# EAGLE board teensyShield1.7 (EAGLE 7.7.0)
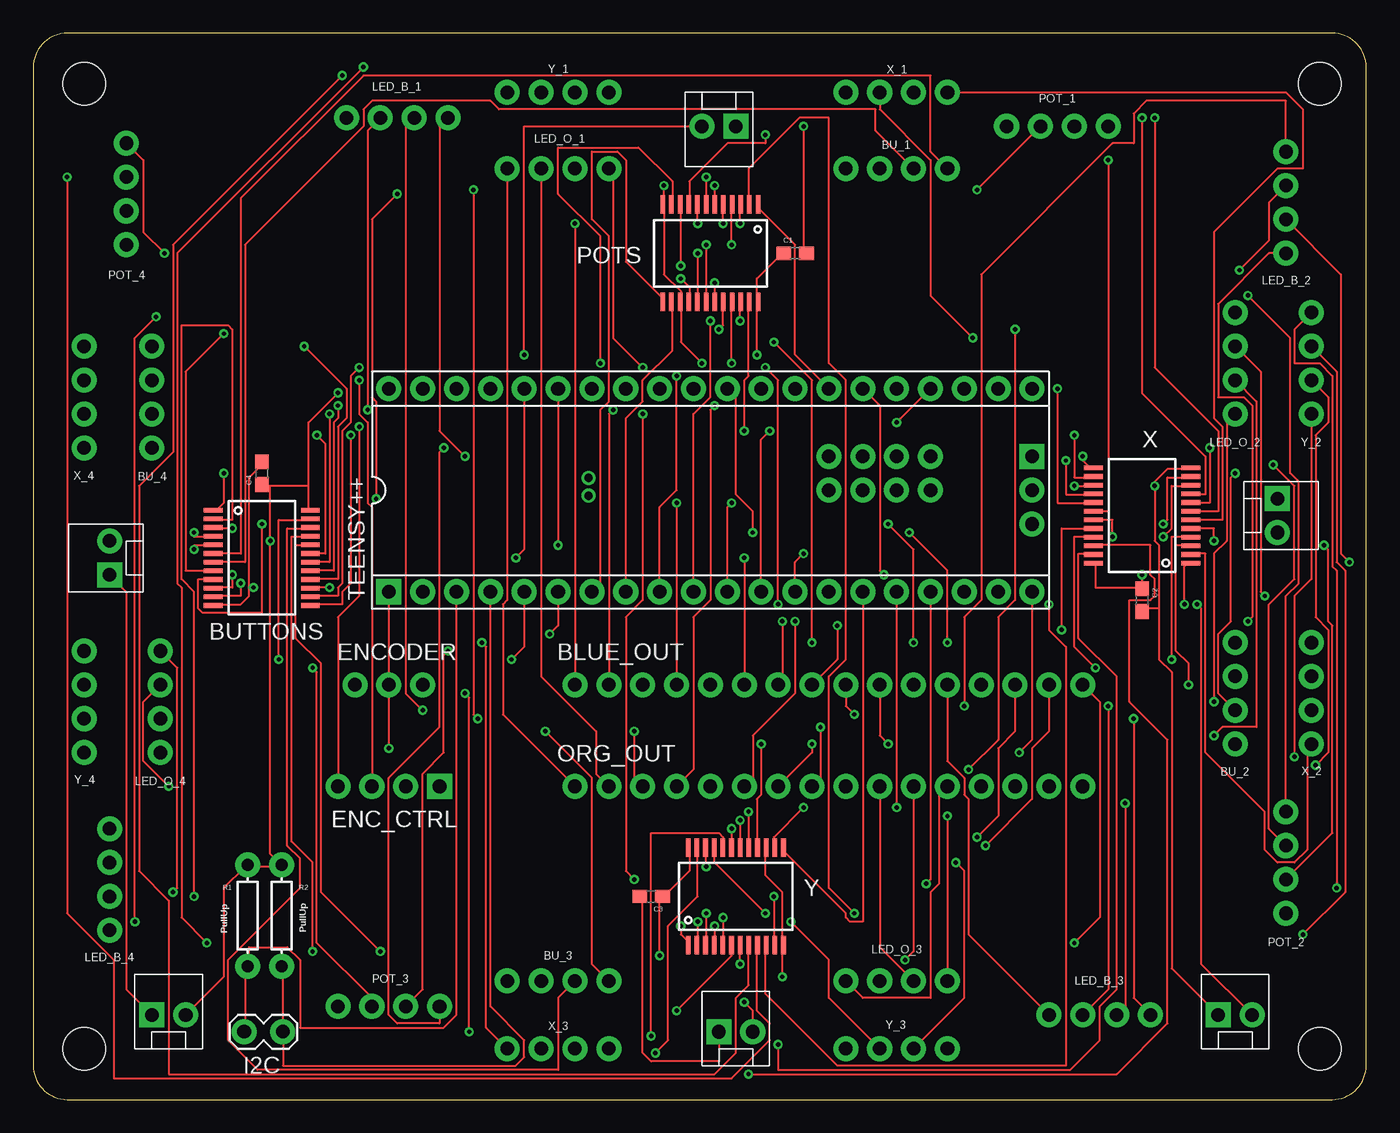
[diagram p0: board, top side]
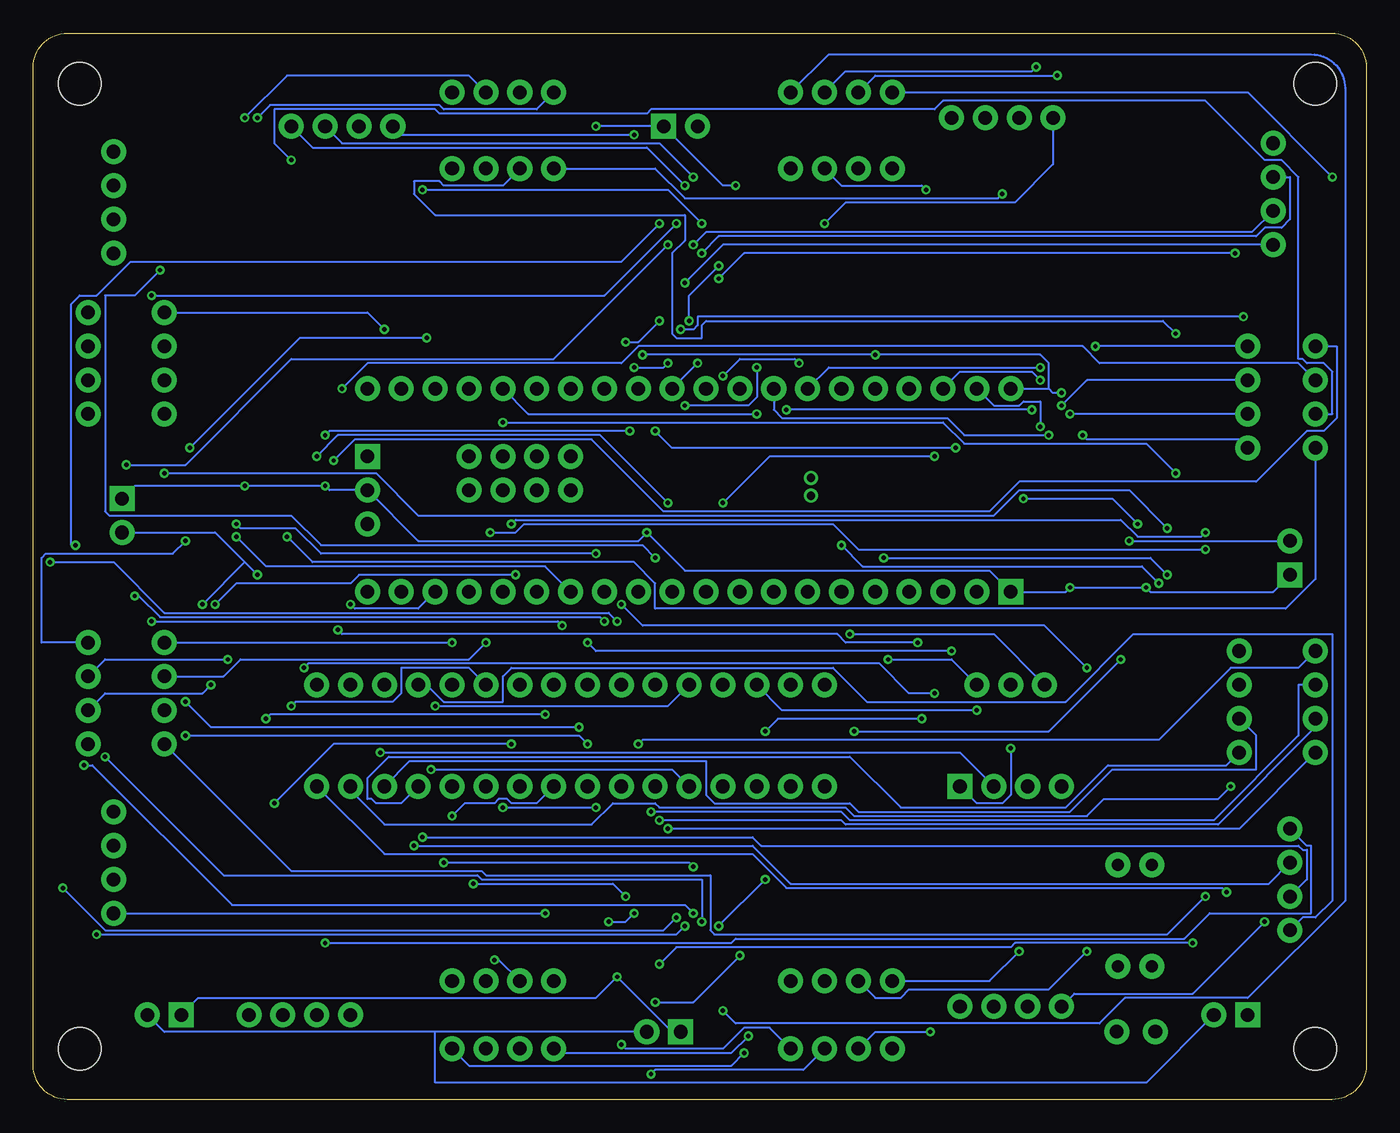
[diagram p1: board, bottom side, seen from below]

Size 100 x 80 mm. Coordinates in mm from the lower left corner, seen from the top.
Outline: 2.54,0 97.46,0 arc90 100,2.54 100,77.46 arc90 97.46,80 2.54,80 arc90 0,77.46 0,2.54 arc90 2.54,0
Copper layers (1*16): Top 0.0356mm / dielectric 1.5011mm / Bottom 0.0356mm
Design rules "oshpark-2layer": minimum track width 6mil, minimum drill 13mil, track to track 6mil, track to pad 6mil, pad to pad 6mil, via to via 6mil, smd to smd 6mil, copper to edge 15mil, drill to drill 6mil, minimum pad ring 7mil, minimum via ring 7mil, stop-mask expansion 2.5mil, vias tented up to drill 0mil, thermal gap 10mil
Holes 3.2 mm at 96.52,3.81 96.52,76.2 3.81,76.2 3.81,3.81

## Footprints (pad centres in the part's own frame; a part is rotated, then mirrored left to right if it is on the bottom)
1X16_NO_SILK = drill 1.016 pad 1.88: 1 0,0; 2 2.54,0; 3 5.08,0; 4 7.62,0; 5 10.16,0; 6 12.7,0; 7 15.24,0; 8 17.78,0; 9 20.32,0; 10 22.86,0; 11 25.4,0; 12 27.94,0; 13 30.48,0; 14 33.02,0; 15 35.56,0; 16 38.1,0
1X04_NO_SILK_ALL_ROUND = drill 1.016 pad 1.88: 1 0,0; 2 2.54,0; 3 5.08,0; 4 7.62,0
SSOP24 = smd 0.348 x 1.397: 1 -3.575,-3.656; 2 -2.925,-3.656; 3 -2.275,-3.656; 4 -1.625,-3.656; 5 -0.975,-3.656; 6 -0.325,-3.656; 7 0.325,-3.656; 8 0.975,-3.656; 9 1.625,-3.656; 10 2.275,-3.656; 11 2.925,-3.656; 12 3.575,-3.656; 13 3.575,3.656; 14 2.925,3.656; 15 2.275,3.656; 16 1.625,3.656; 17 0.975,3.656; 18 0.325,3.656; 19 -0.325,3.656; 20 -0.975,3.656; 21 -1.625,3.656; 22 -2.275,3.656; 23 -2.925,3.656; 24 -3.575,3.656
0603 = smd 1.1 x 1: 1 -0.85,0; 2 0.85,0
1X04_NO_SILK = drill 1.016 pad 1.88 square: 1 0,0 | drill 1.016 pad 1.88: 2 2.54,0; 3 5.08,0; 4 7.62,0
1X03_NO_SILK = drill 1.016 pad 1.88: 1 0,0; 2 2.54,0; 3 5.08,0
1X02_LOCK = drill 1.016 pad 1.88: 1 -0.178,0; 2 2.718,0
MOLEX-1X2 = drill 1.016 pad 1.88 square: 1 0,0 | drill 1.016 pad 1.88: 2 2.54,0
AXIAL-0.3 = drill 0.9 pad 1.88: P$1 -3.81,0; P$2 3.81,0
TEENSY++ = drill 1.016 pad 1.88: 5V 24.13,-2.54; +5V -24.13,7.62; A0 8.89,0; A1 11.43,0; A2 13.97,0; A3 16.51,0; A4 8.89,2.54; A5 11.43,2.54; A6 13.97,2.54; A7 16.51,2.54; B0 -6.35,7.62; B1 -8.89,7.62; B2 -11.43,7.62; B3 -13.97,7.62; B4 -16.51,7.62; B5 -19.05,7.62; B6 -21.59,7.62; B7 -21.59,-7.62; C0 6.35,-7.62; C1 8.89,-7.62; C2 11.43,-7.62; C3 13.97,-7.62; C4 16.51,-7.62; C5 19.05,-7.62; C6 21.59,-7.62; C7 24.13,-7.62; D0 -19.05,-7.62; D1 -16.51,-7.62; D2 -13.97,-7.62; D3 -11.43,-7.62; D4 -8.89,-7.62; D5 -6.35,-7.62; D6 -3.81,-7.62; D7 -1.27,-7.62; E0 1.27,-7.62; E1 3.81,-7.62; E6 -1.27,7.62; E7 -3.81,7.62; F0 6.35,7.62; F1 8.89,7.62; F2 11.43,7.62; F3 13.97,7.62; F4 16.51,7.62; F5 19.05,7.62; F6 21.59,7.62; F7 24.13,7.62; GND2 24.13,0; GRND1 1.27,7.62; REF 3.81,7.62 | drill 0.635 pad 1.067: E4 -9.144,0.914; E5 -9.144,-0.406 | drill 1.016 pad 1.88 square: GND -24.13,-7.62; RST 24.13,2.54

## Placement (x,y rotation side)
BLUE_OUT  [1X16_NO_SILK]  40.64,31.11 0 top
BU_1  [1X04_NO_SILK_ALL_ROUND]  60.96,69.85 0 top
BU_2  [1X04_NO_SILK_ALL_ROUND]  90.17,34.29 270 top
BU_3  [1X04_NO_SILK_ALL_ROUND]  43.18,8.89 180 top
BU_4  [1X04_NO_SILK_ALL_ROUND]  8.89,48.9 90 top
BUTTONS  MUX-74HC4067  [SSOP24]  17.14,40.64 270 top
C1  0.1uF  [0603]  57.15,63.5 0 top
C2  0.1uF  [0603]  83.19,37.47 270 top
C3  0.1uF  [0603]  46.35,15.24 180 top
C4  0.1uF  [0603]  17.14,46.99 90 top
ENC_CTRL  [1X04_NO_SILK]  30.48,23.5 180 top
ENCODER  [1X03_NO_SILK]  24.13,31.11 0 top
I2C  [1X02_LOCK]  18.54,5.09 180 top
LED_B_1  [1X04_NO_SILK_ALL_ROUND]  23.5,73.66 0 top
LED_B_2  [1X04_NO_SILK_ALL_ROUND]  93.98,71.12 270 top
LED_B_3  [1X04_NO_SILK_ALL_ROUND]  83.82,6.35 180 top
LED_B_4  [1X04_NO_SILK_ALL_ROUND]  5.71,12.7 90 top
LED_O_1  [1X04_NO_SILK_ALL_ROUND]  35.56,69.85 0 top
LED_O_2  [1X04_NO_SILK_ALL_ROUND]  90.17,59.05 270 top
LED_O_3  [1X04_NO_SILK_ALL_ROUND]  68.58,8.89 180 top
LED_O_4  [1X04_NO_SILK_ALL_ROUND]  9.53,26.04 90 top
ORG_OUT  [1X16_NO_SILK]  40.64,23.5 0 top
POT_1  [1X04_NO_SILK_ALL_ROUND]  73.03,73.03 0 top
POT_2  [1X04_NO_SILK_ALL_ROUND]  93.98,21.59 270 top
POT_3  [1X04_NO_SILK_ALL_ROUND]  30.48,6.99 180 top
POT_4  [1X04_NO_SILK_ALL_ROUND]  6.99,64.14 90 top
POTS  MUX-74HC4067  [SSOP24]  50.8,63.5 180 top
POW_1  [MOLEX-1X2]  5.71,39.37 90 top
POW_2  [MOLEX-1X2]  52.7,73.03 180 top
POW_3  [MOLEX-1X2]  93.34,45.09 270 top
POW_4  [MOLEX-1X2]  51.44,5.08 0 top
POW_IN  [MOLEX-1X2]  8.89,6.35 0 top
POW_OUT  [MOLEX-1X2]  88.9,6.35 0 top
R1  PullUp  [AXIAL-0.3]  16.09,13.8 90 top
R2  PullUp  [AXIAL-0.3]  18.63,13.8 270 top
TEENSY++  ARDUINO-TEENSY++  [TEENSY++]  50.8,45.72 0 top
X  MUX-74HC4067  [SSOP24]  83.19,43.81 90 top
X_1  [1X04_NO_SILK_ALL_ROUND]  60.96,75.56 0 top
X_2  [1X04_NO_SILK_ALL_ROUND]  95.89,34.29 270 top
X_3  [1X04_NO_SILK_ALL_ROUND]  43.18,3.81 180 top
X_4  [1X04_NO_SILK_ALL_ROUND]  3.81,48.9 90 top
Y  MUX-74HC4067  [SSOP24]  52.7,15.24 0 top
Y_1  [1X04_NO_SILK_ALL_ROUND]  35.56,75.56 0 top
Y_2  [1X04_NO_SILK_ALL_ROUND]  95.89,59.05 270 top
Y_3  [1X04_NO_SILK_ALL_ROUND]  68.58,3.81 180 top
Y_4  [1X04_NO_SILK_ALL_ROUND]  3.81,26.04 90 top

## Library data of the parts
BLUE_OUT ENCODER I2C ORG_OUT POW_1-POW_4 POW_IN POW_OUT = SparkFun-Connectors
BU_1-BU_4 ENC_CTRL LED_B_1-LED_B_4 LED_O_1-LED_O_4 POT_1-POT_4 X_1-X_4 Y_1-Y_4 = SparkFun-Connectors; PROD_ID: CONN-09696
BUTTONS C1-C4 POTS X Y = SparkFun
R1 R2 = SparkFun-Resistors; PROD_ID: RES-9435
TEENSY++ = teensypp

## Nets
5V: BUTTONS.24 C1.1 C2.1 C3.1 C4.1 POTS.24 POW_1.2 POW_2.2 POW_3.2 POW_4.2 POW_IN.2 POW_OUT.2 R1.P$2 R2.P$1 TEENSY++.+5V X.24 Y.24
BU_C0: BU_1.1 BUTTONS.9
BU_C1: BU_1.2 BUTTONS.8
BU_C2: BU_1.3 BUTTONS.7
BU_C3: BU_1.4 BUTTONS.6
BU_C4: BU_2.1 BUTTONS.5
BU_C5: BU_2.2 BUTTONS.4
BU_C6: BU_2.3 BUTTONS.3
BU_C7: BU_2.4 BUTTONS.2
BU_C8: BU_3.1 BUTTONS.23
BU_C9: BU_3.2 BUTTONS.22
BU_C10: BU_3.3 BUTTONS.21
BU_C11: BU_3.4 BUTTONS.20
BU_C12: BU_4.1 BUTTONS.19
BU_C13: BU_4.2 BUTTONS.18
BU_C14: BU_4.3 BUTTONS.17
BU_C15: BU_4.4 BUTTONS.16
ENC_1: ENCODER.3 TEENSY++.D2
ENC_2: ENCODER.1 TEENSY++.D3
ENC_BU: ENC_CTRL.2 TEENSY++.C7
ENC_G: ENC_CTRL.3 TEENSY++.B5
ENC_R: ENC_CTRL.4 TEENSY++.B6
GND: BUTTONS.12 BUTTONS.15 C1.2 C2.2 C3.2 C4.2 ENC_CTRL.1 ENCODER.2 POTS.12 POTS.15 POW_1.1 POW_2.1 POW_3.1 POW_4.1 POW_IN.1 POW_OUT.1 TEENSY++.GND TEENSY++.GND2 TEENSY++.GRND1 X.12 X.15 Y.12 Y.15
LED_B_C0: BLUE_OUT.1 LED_B_1.1
LED_B_C1: BLUE_OUT.2 LED_B_1.2
LED_B_C2: BLUE_OUT.3 LED_B_1.3
LED_B_C3: BLUE_OUT.4 LED_B_1.4
LED_B_C4: BLUE_OUT.5 LED_B_2.1
LED_B_C5: BLUE_OUT.6 LED_B_2.2
LED_B_C6: BLUE_OUT.7 LED_B_2.3
LED_B_C7: BLUE_OUT.8 LED_B_2.4
LED_B_C8: BLUE_OUT.9 LED_B_3.1
LED_B_C9: BLUE_OUT.10 LED_B_3.2
LED_B_C10: BLUE_OUT.11 LED_B_3.3
LED_B_C11: BLUE_OUT.12 LED_B_3.4
LED_B_C12: BLUE_OUT.13 LED_B_4.1
LED_B_C13: BLUE_OUT.14 LED_B_4.2
LED_B_C14: BLUE_OUT.15 LED_B_4.3
LED_B_C15: BLUE_OUT.16 LED_B_4.4
LED_O_C0: LED_O_1.1 ORG_OUT.1
LED_O_C1: LED_O_1.2 ORG_OUT.2
LED_O_C2: LED_O_1.3 ORG_OUT.3
LED_O_C3: LED_O_1.4 ORG_OUT.4
LED_O_C4: LED_O_2.1 ORG_OUT.5
LED_O_C5: LED_O_2.2 ORG_OUT.6
LED_O_C6: LED_O_2.3 ORG_OUT.7
LED_O_C7: LED_O_2.4 ORG_OUT.8
LED_O_C8: LED_O_3.1 ORG_OUT.9
LED_O_C9: LED_O_3.2 ORG_OUT.10
LED_O_C10: LED_O_3.3 ORG_OUT.11
LED_O_C11: LED_O_3.4 ORG_OUT.12
LED_O_C12: LED_O_4.1 ORG_OUT.13
LED_O_C13: LED_O_4.2 ORG_OUT.14
LED_O_C14: LED_O_4.3 ORG_OUT.15
LED_O_C15: LED_O_4.4 ORG_OUT.16
MUX1_S0: POTS.10 TEENSY++.D7
MUX1_S1: POTS.11 TEENSY++.D6
MUX1_S2: POTS.14 TEENSY++.D5
MUX1_S3: POTS.13 TEENSY++.D4
MUX1_SIG: POTS.1 TEENSY++.F1
MUX2_S0: TEENSY++.C1 X.10
MUX2_S1: TEENSY++.C0 X.11
MUX2_S2: TEENSY++.E1 X.14
MUX2_S3: TEENSY++.E0 X.13
MUX2_SIG: TEENSY++.F2 X.1
MUX3_S0: TEENSY++.C5 Y.10
MUX3_S1: TEENSY++.C4 Y.11
MUX3_S2: TEENSY++.C3 Y.14
MUX3_S3: TEENSY++.C2 Y.13
MUX3_SIG: TEENSY++.F3 Y.1
MUX4_S0: BUTTONS.10 TEENSY++.B3
MUX4_S1: BUTTONS.11 TEENSY++.B2
MUX4_S2: BUTTONS.14 TEENSY++.B1
MUX4_S3: BUTTONS.13 TEENSY++.B0
MUX4_SIG: BUTTONS.1 TEENSY++.F4
POT_C0: POT_1.1 POTS.9
POT_C1: POT_1.2 POTS.8
POT_C2: POT_1.3 POTS.7
POT_C3: POT_1.4 POTS.6
POT_C4: POT_2.1 POTS.5
POT_C5: POT_2.2 POTS.4
POT_C6: POT_2.3 POTS.3
POT_C7: POT_2.4 POTS.2
POT_C8: POT_3.1 POTS.23
POT_C9: POT_3.2 POTS.22
POT_C10: POT_3.3 POTS.21
POT_C11: POT_3.4 POTS.20
POT_C12: POT_4.1 POTS.19
POT_C13: POT_4.2 POTS.18
POT_C14: POT_4.3 POTS.17
POT_C15: POT_4.4 POTS.16
SCL: I2C.2 R1.P$1 TEENSY++.D0
SDA: I2C.1 R2.P$2 TEENSY++.D1
VCC: TEENSY++.5V
X_C0: X.9 X_1.1
X_C1: X.8 X_1.2
X_C2: X.7 X_1.3
X_C3: X.6 X_1.4
X_C4: X.5 X_2.1
X_C5: X.4 X_2.2
X_C6: X.3 X_2.3
X_C7: X.2 X_2.4
X_C8: X.23 X_3.1
X_C9: X.22 X_3.2
X_C10: X.21 X_3.3
X_C11: X.20 X_3.4
X_C12: X.19 X_4.1
X_C13: X.18 X_4.2
X_C14: X.17 X_4.3
X_C15: X.16 X_4.4
Y_C0: Y.9 Y_1.1
Y_C1: Y.8 Y_1.2
Y_C2: Y.7 Y_1.3
Y_C3: Y.6 Y_1.4
Y_C4: Y.5 Y_2.1
Y_C5: Y.4 Y_2.2
Y_C6: Y.3 Y_2.3
Y_C7: Y.2 Y_2.4
Y_C8: Y.23 Y_3.1
Y_C9: Y.22 Y_3.2
Y_C10: Y.21 Y_3.3
Y_C11: Y.20 Y_3.4
Y_C12: Y.19 Y_4.1
Y_C13: Y.18 Y_4.2
Y_C14: Y.17 Y_4.3
Y_C15: Y.16 Y_4.4

## Tracks (layer width: path | path; a pad name or v marks a point on that pad's centre or on a via)
5V  (via drill 0.33)
  Top 0.152: 83.19,38.42 79.69,38.42 79.69,40.32 X.24 | v83.19,39.37 83.19,38.42 | 83.19,38.42 C2.1 | Y.24 49.21,18.73 49.21,17.14 47.31,15.24 C3.1 46.99,15.24 v46.99,10.79 | v53.34,7.3 53.98,6.67 POW_4.2 | v87.31,37.15 87.63,36.83 87.63,10.16 POW_OUT.2 | C1.1 56.2,63.5 54.29,61.59 54.29,60.01 POTS.24 54.29,59.69 v54.29,55.88 | POW_2.2 36.83,73.03 v36.83,55.88 | POW_IN.2 14.29,9.21 14.29,15.88 15.88,17.46 R1.P$2 16.19,17.46 18.41,17.46 R2.P$1 18.41,17.78 17.78,18.41 v17.78,41.91 17.78,46.04 | 20.64,46.04 17.78,46.04 | 17.78,46.04 17.14,46.04 C4.1 | 20.64,46.04 20.64,44.13 BUTTONS.24 | v22.86,53.02 20.64,50.8 20.64,46.04
  Bottom 0.152: 84.14,40.32 86.36,42.55 POW_3.2 | 84.14,40.32 v83.19,39.37 | v46.99,10.79 50.48,7.3 v53.34,7.3 | POW_OUT.2 90.17,5.08 69.85,5.08 | POW_4.2 69.85,5.08 | v87.31,37.15 84.14,40.32 | v54.29,55.88 v36.83,55.88 24.45,55.88 23.81,55.24 23.81,53.34 | TEENSY++.+5V 23.81,53.34 | v17.78,41.91 POW_1.2 | 23.81,53.34 23.5,53.02 v22.86,53.02 | 69.85,5.08 69.85,1.27 16.51,1.27 POW_IN.2
BU_C0  (via drill 0.33)
  Top 0.152: v17.14,43.18 17.14,36.51 12.7,36.51 12.38,36.83 12.38,39.05 13.34,39.05 BUTTONS.9 | v25.72,45.09 25.72,52.39 25.4,52.7 25.4,66.04 v27.3,67.94
  Bottom 0.152: v17.14,43.18 19.05,45.09 v25.72,45.09 | v27.3,67.94 27.62,67.63 51.12,67.63 53.34,69.85 BU_1.1
BU_C1  (via drill 0.33)
  Top 0.152: v14.29,57.47 11.43,54.61 11.43,39.69 13.34,39.69 BUTTONS.8
  Bottom 0.152: v14.29,57.47 15.24,58.42 49.53,58.42 49.85,58.1 49.85,57.15 51.75,57.15 52.07,57.47 52.07,63.5 51.12,64.45 51.12,66.36 69.85,66.36 71.44,67.94 71.44,68.9 69.53,68.9 69.22,68.58 64.77,68.58 BU_1.2
BU_C2
  Top 0.152: BU_1.3 63.18,72.71 63.18,74.3 34.92,74.3 34.29,74.93 25.4,74.93 24.77,74.3 24.77,73.03 15.88,64.14 15.88,40.32 13.65,40.32 BUTTONS.7
BU_C3
  Top 0.152: BU_1.4 67.31,71.12 67.31,76.83 24.77,76.83 15.56,67.63 15.56,40.96 13.65,40.96 BUTTONS.6
BU_C4  (via drill 0.33)
  Top 0.152: v12.06,41.27 12.06,41.59 13.34,41.59 BUTTONS.5 | v65.72,42.55 68.58,39.69 v68.58,34.29
  Bottom 0.152: v12.06,41.27 38.1,41.27 40.01,43.18 63.18,43.18 63.82,42.55 v65.72,42.55 | BU_2.1 v68.58,34.29
BU_C5  (via drill 0.33)
  Top 0.152: v12.06,42.55 12.06,42.23 13.34,42.23 BUTTONS.4 | v64.14,43.18 66.04,41.27 v66.04,34.29
  Bottom 0.152: v12.06,42.55 12.38,42.23 17.14,42.23 18.41,43.5 63.82,43.5 v64.14,43.18 | v66.04,34.29 67.31,33.02 84.45,33.02 85.72,31.75 BU_2.2
BU_C6  (via drill 0.33)
  Top 0.152: v14.92,42.86 13.65,42.86 BUTTONS.3 | v90.17,46.99 89.85,46.67 89.85,35.88 88.9,34.92 88.9,30.48 BU_2.3
  Bottom 0.152: v14.92,42.86 17.78,45.72 26.04,45.72 27.94,43.81 71.12,43.81 74.3,46.99 v90.17,46.99
BU_C7  (via drill 0.33)
  Top 0.152: v12.06,15.24 12.06,38.1 11.11,39.05 11.11,58.1 14.61,58.1 14.92,57.78 14.92,43.5 13.65,43.5 BUTTONS.2
  Bottom 0.152: v12.06,15.24 14.92,12.38 48.9,12.38 49.21,12.7 49.21,16.83 66.04,16.83 66.36,17.14 80.64,17.14 BU_2.4
BU_C8  (via drill 0.33)
  Top 0.152: v18.41,33.02 18.41,43.5 20.64,43.5 BUTTONS.23 | v38.42,27.62 41.91,24.13 41.91,10.16 BU_3.1
  Bottom 0.152: v18.41,33.02 23.81,27.62 v38.42,27.62
BU_C9
  Top 0.152: BU_3.2 39.37,7.62 39.37,2.22 16.83,2.22 14.61,4.45 14.61,10.48 20,15.88 20,18.1 19.05,19.05 19.05,42.86 20.64,42.86 BUTTONS.22
BU_C10  (via drill 0.33)
  Top 0.152: v20.95,11.11 20.95,17.78 19.37,19.37 19.37,42.23 20.64,42.23 BUTTONS.21
  Bottom 0.152: v20.95,11.11 23.81,8.26 34.29,8.26 34.92,7.62 36.83,7.62 BU_3.3
BU_C11  (via drill 0.33)
  Top 0.152: v26.04,11.11 21.59,15.56 21.59,32.7 19.68,34.61 19.68,41.59 20.64,41.59 BUTTONS.20
  Bottom 0.152: v26.04,11.11 28.26,8.89 BU_3.4
BU_C12  (via drill 0.33)
  Top 0.152: v21.27,49.85 21.91,49.21 21.91,40.96 20.95,40.96 BUTTONS.19
  Bottom 0.152: v21.27,49.85 20.95,49.53 9.53,49.53 BU_4.1
BU_C13  (via drill 0.33)
  Top 0.152: v22.23,51.44 22.23,40.32 20.95,40.32 BUTTONS.18
  Bottom 0.152: BU_4.2 v22.23,51.44
BU_C14  (via drill 0.33)
  Top 0.152: v22.86,52.07 22.86,51.12 22.54,50.8 22.54,39.69 20.95,39.69 BUTTONS.17
  Bottom 0.152: v22.86,52.07 20.95,53.98 BU_4.3
BU_C15  (via drill 0.33)
  Top 0.152: v20.32,56.52 23.5,53.34 23.5,51.12 22.86,50.48 22.86,39.05 20.95,39.05 BUTTONS.16
  Bottom 0.152: BU_4.4 v20.32,56.52
ENC_1  (via drill 0.33)
  Top 0.152: v35.88,33.02 36.83,33.97 TEENSY++.D2
  Bottom 0.152: ENCODER.3 31.11,33.02 v35.88,33.02
ENC_2  (via drill 0.33)
  Top 0.152: v38.73,34.92 39.37,35.56 TEENSY++.D3
  Bottom 0.152: ENCODER.1 27.94,34.92 v38.73,34.92
ENC_BU  (via drill 0.33)
  Top 0.152: v73.98,26.04 74.93,26.99 TEENSY++.C7
  Bottom 0.152: ENC_CTRL.2 30.48,26.04 v73.98,26.04
ENC_G  (via drill 0.33)
  Top 0.152: ENC_CTRL.3 25.4,44.45 25.08,44.77 25.08,50.8 24.45,51.44 v24.45,53.98
  Bottom 0.152: v24.45,53.98 25.08,54.61 30.48,54.61 TEENSY++.B5
ENC_R  (via drill 0.33)
  Top 0.152: ENC_CTRL.4 22.86,36.2 24.45,37.78 v24.45,50.48
  Bottom 0.152: v24.45,50.48 24.45,52.39 25.72,52.39 26.04,52.07 27.94,52.07 TEENSY++.B6
GND  (via drill 0.33)
  Top 0.152: POW_IN.1 6.99,8.26 6.99,38.1 POW_1.1 | 16.19,38.42 16.19,37.78 15.56,37.15 13.65,37.15 BUTTONS.12 | 16.19,38.42 16.19,46.67 17.14,47.62 C4.2 | v22.23,38.42 20.95,38.42 BUTTONS.15 | TEENSY++.GND ENCODER.2 v26.67,26.35 | v16.51,38.42 16.19,38.42 | v57.78,73.03 57.78,63.5 C1.2 | v50.16,55.24 48.58,56.83 48.58,59.69 POTS.15 48.58,60.01 48.58,60.64 47.31,61.91 47.31,66.99 POTS.12 47.31,67.31 v47.31,68.58 | Y.15 54.93,18.73 54.93,16.83 56.2,15.56 56.2,11.75 Y.12 56.2,11.43 v56.2,9.21 | POW_4.1 51.44,2.86 46.35,2.86 45.72,3.49 45.72,15.24 C3.2 | v78.11,46.04 79.38,46.04 X.15 | 84.45,36.83 83.19,36.83 C2.2 | 84.45,36.83 84.45,41.59 84.14,41.91 v84.14,46.04 84.14,46.35 85.09,47.31 86.68,47.31 X.12 | POW_OUT.1 85.41,9.84 85.41,32.07 84.45,33.02 84.45,36.83 | TEENSY++.GRND1 52.7,52.7 52.7,45.4 53.98,44.13 v53.98,42.55
  Bottom 0.152: ENC_CTRL.1 29.21,22.23 27.3,22.23 26.67,22.86 v26.67,26.35 | POW_1.1 6.99,38.1 16.19,38.1 v16.51,38.42 v22.23,38.42 22.54,38.1 TEENSY++.GND 28.26,39.69 51.12,39.69 v53.98,42.55 54.61,41.91 71.12,41.91 TEENSY++.GND2 77.79,45.72 v78.11,46.04 v84.14,46.04 92.39,46.04 POW_3.1 | v57.78,73.03 POW_2.1 48.26,68.58 v47.31,68.58 | v50.16,55.24 TEENSY++.GRND1 | POW_4.1 52.07,5.08 v56.2,9.21 57.78,7.62 87.63,7.62 POW_OUT.1
LED_B_C0  (via drill 0.33)
  Top 0.152: v40.64,65.72 BLUE_OUT.1
  Bottom 0.152: v40.64,65.72 39.05,67.31 26.35,67.31 23.5,70.17 LED_B_1.1
LED_B_C1  (via drill 0.33)
  Top 0.152: BLUE_OUT.2 43.18,51.44 v43.5,51.75 | v25.08,51.75 25.08,72.71 LED_B_1.2
  Bottom 0.152: v25.08,51.75 v43.5,51.75
LED_B_C2  (via drill 0.33)
  Top 0.152: v29.21,29.21 27.94,30.48 27.94,73.03 LED_B_1.3
  Bottom 0.152: BLUE_OUT.3 43.81,29.21 v29.21,29.21
LED_B_C3  (via drill 0.33)
  Top 0.152: v48.26,44.77 BLUE_OUT.4 | v32.38,48.26 30.48,50.16 30.48,73.03 LED_B_1.4
  Bottom 0.152: v48.26,44.77 44.77,48.26 v32.38,48.26
LED_B_C4  (via drill 0.33)
  Top 0.152: v69.85,29.53 69.85,36.2 71.12,37.47 71.12,61.91 80.96,71.75 82.55,71.75 82.55,73.98 83.5,74.93 93.98,74.93 LED_B_2.1
  Bottom 0.152: BLUE_OUT.5 52.39,29.53 v69.85,29.53
LED_B_C5  (via drill 0.33)
  Top 0.152: v53.34,40.64 BLUE_OUT.6 | v90.49,62.23 92.71,64.45 92.71,67.31 LED_B_2.2
  Bottom 0.152: v53.34,40.64 54.29,41.59 78.42,41.59 80.64,43.81 94.3,43.81 94.61,44.13 94.61,60.33 92.39,60.33 v90.49,62.23
LED_B_C6  (via drill 0.33)
  Top 0.152: BLUE_OUT.7 56.2,31.43 v56.2,35.88 | v98.74,40.32 98.11,40.96 98.11,61.91 LED_B_2.3
  Bottom 0.152: v56.2,35.88 56.83,36.51 90.17,36.51 93.98,40.32 v98.74,40.32
LED_B_C7  (via drill 0.33)
  Top 0.152: BLUE_OUT.8 60.33,33.02 v60.33,35.56 | v91.12,35.88 91.44,36.2 91.44,52.07 90.81,52.7 88.9,52.7 88.9,59.69 92.71,63.5 LED_B_2.4
  Bottom 0.152: v60.33,35.56 60.64,35.88 v91.12,35.88
LED_B_C8  (via drill 0.33)
  Top 0.152: LED_B_3.1 82.55,7.62 v82.55,28.57 | v61.59,28.89 60.96,29.53 BLUE_OUT.9
  Bottom 0.152: v82.55,28.57 82.23,28.89 v61.59,28.89
LED_B_C9  (via drill 0.33)
  Top 0.152: LED_B_3.2 81.92,6.99 v81.92,22.23 | v64.14,26.67 63.5,27.3 BLUE_OUT.10
  Bottom 0.152: v81.92,22.23 77.47,26.67 v64.14,26.67
LED_B_C10  (via drill 0.33)
  Top 0.152: LED_B_3.3 80.64,8.26 v80.64,29.53
  Bottom 0.152: v80.64,29.53 80.33,29.84 73.03,29.84 72.39,30.48 72.39,32.38 67.31,32.38 BLUE_OUT.11
LED_B_C11
  Top 0.152: LED_B_3.4 70.17,12.38 70.17,22.54 69.85,22.86 69.85,24.13 68.58,25.4 BLUE_OUT.12
LED_B_C12
  Bottom 0.152: LED_B_4.1 4.76,13.65 3.81,13.65 2.54,14.92 2.54,34.92 17.46,34.92 22.54,29.84 37.47,29.84 40.01,32.38 64.14,32.38 64.77,31.75 64.77,29.84 69.22,29.84 70.48,31.11 BLUE_OUT.13
LED_B_C13  (via drill 0.33)
  Top 0.152: v70.8,19.68 72.39,21.27 72.39,26.35 73.66,27.62 BLUE_OUT.14
  Bottom 0.152: LED_B_4.2 4.45,16.51 4.45,18.73 4.76,18.73 5.08,19.05 45.4,19.05 46.04,19.68 v70.8,19.68
LED_B_C14  (via drill 0.33)
  Top 0.152: v71.44,19.05 74.93,22.54 74.93,26.35 76.2,27.62 BLUE_OUT.15
  Bottom 0.152: LED_B_4.3 7.3,16.19 43.18,16.19 46.04,19.05 v71.44,19.05
LED_B_C15  (via drill 0.33)
  Top 0.152: v78.11,11.75 80.01,13.65 80.01,29.84 BLUE_OUT.16
  Bottom 0.152: LED_B_4.4 4.45,19.05 4.13,19.05 4.13,13.97 11.75,13.97 13.65,12.06 47.31,12.06 47.62,11.75 v78.11,11.75
LED_O_C0
  Top 0.152: ORG_OUT.1 35.24,28.89 35.24,37.15 35.56,37.47 LED_O_1.1
LED_O_C1
  Top 0.152: ORG_OUT.2 42.23,24.45 42.23,27.62 38.1,31.75 LED_O_1.2
LED_O_C2  (via drill 0.33)
  Top 0.152: ORG_OUT.3 45.09,24.13 v45.09,27.62 | v33.34,28.57 33.02,28.89 v33.02,68.26
  Bottom 0.152: v45.09,27.62 44.13,28.57 v33.34,28.57 | v33.02,68.26 33.34,68.58 39.37,68.58 LED_O_1.3
LED_O_C3  (via drill 0.33)
  Top 0.152: ORG_OUT.4 49.53,24.77 49.53,36.2 50.8,37.47 50.8,51.75 v51.12,52.07 | v45.72,54.93 43.5,57.15 43.5,69.53 LED_O_1.4
  Bottom 0.152: v51.12,52.07 46.35,52.07 45.72,52.7 v45.72,54.93
LED_O_C4  (via drill 0.33)
  Top 0.152: v70.17,24.77 72.39,26.99 72.39,36.2 73.66,37.47 v73.66,57.78
  Bottom 0.152: ORG_OUT.5 52.07,24.77 v70.17,24.77 | v73.66,57.78 74.93,59.05 LED_O_2.1
LED_O_C5  (via drill 0.33)
  Top 0.152: ORG_OUT.6 53.98,24.13 53.98,27.3 57.15,30.48 v57.15,35.88 | v92.39,37.78 92.08,38.1 92.08,54.61 LED_O_2.2
  Bottom 0.152: v57.15,35.88 57.47,36.2 90.49,36.2 92.08,37.78 v92.39,37.78
LED_O_C6  (via drill 0.33)
  Top 0.152: ORG_OUT.7 58.42,26.04 v58.42,26.67 | v88.58,27.3 89.22,27.94 91.76,27.94 91.76,52.39 LED_O_2.3
  Bottom 0.152: v58.42,26.67 59.05,27.3 v88.58,27.3
LED_O_C7  (via drill 0.33)
  Top 0.152: ORG_OUT.8 59.05,24.13 v59.05,27.94 | v88.58,29.84 88.58,40.96 89.53,41.91 89.53,50.8 LED_O_2.4
  Bottom 0.152: v59.05,27.94 86.68,27.94 v88.58,29.84
LED_O_C8  (via drill 0.33)
  Top 0.152: v68.58,21.27 LED_O_3.1
  Bottom 0.152: v68.58,21.27 67.63,22.23 65.41,22.23 65.09,22.54 64.45,22.54 64.14,22.23 62.23,22.23 ORG_OUT.9
LED_O_C9
  Top 0.152: LED_O_3.2 63.5,11.43 ORG_OUT.10
LED_O_C10  (via drill 0.33)
  Top 0.152: v65.41,10.48 66.04,11.11 ORG_OUT.11
  Bottom 0.152: LED_O_3.3 65.09,10.48 v65.41,10.48
LED_O_C11
  Top 0.152: LED_O_3.4 62.23,7.62 67.31,7.62 67.31,15.56 67.94,16.19 67.94,22.86 ORG_OUT.12
LED_O_C12
  Bottom 0.152: LED_O_4.1 10.48,25.08 19.37,25.08 22.54,21.91 34.92,21.91 38.73,25.72 73.34,25.72 74.93,24.13 74.93,22.54 74.61,22.54 74.3,22.23 72.39,22.23 ORG_OUT.13
LED_O_C13
  Bottom 0.152: LED_O_4.2 8.26,27.3 8.26,24.77 19.05,24.77 22.23,21.59 38.1,21.59 38.73,22.23 48.9,22.23 49.53,22.86 49.53,25.4 71.75,25.4 ORG_OUT.14
LED_O_C14  (via drill 0.33)
  Top 0.152: LED_O_4.3 8.26,29.84 8.26,25.4 v10.16,23.5
  Bottom 0.152: v10.16,23.5 11.11,22.54 19.68,22.54 20.95,21.27 38.42,21.27 39.05,21.91 53.02,21.91 53.34,22.23 56.52,22.23 58.1,20.64 73.66,20.64 76.2,23.18 ORG_OUT.15
LED_O_C15  (via drill 0.33)
  Top 0.152: LED_O_4.4 10.79,32.38 10.79,15.88 v10.48,15.56
  Bottom 0.152: v10.48,15.56 10.79,15.88 43.5,15.88 46.04,18.41 73.66,18.41 ORG_OUT.16
MUX1_S0  (via drill 0.33)
  Top 0.152: v48.58,62.55 48.58,66.99 POTS.10 | v50.8,58.42 50.8,52.7 49.53,51.44 TEENSY++.D7
  Bottom 0.152: v48.58,62.55 50.8,60.33 v50.8,58.42
MUX1_S1  (via drill 0.33)
  Top 0.152: v42.55,55.24 42.55,64.77 39.37,67.94 39.37,71.44 45.4,71.44 47.94,68.9 47.94,67.31 POTS.11 | v48.26,54.29 48.26,45.72 46.99,44.45 TEENSY++.D6
  Bottom 0.152: v42.55,55.24 42.86,55.56 46.99,55.56 v48.26,54.29
MUX1_S2
  Top 0.152: TEENSY++.D5 44.45,51.12 45.72,52.39 45.72,53.98 47.94,56.2 47.94,59.69 POTS.14
MUX1_S3
  Top 0.152: TEENSY++.D4 42.55,38.73 42.55,51.75 43.18,52.39 43.18,64.77 41.91,66.04 41.91,71.12 43.81,71.12 44.45,70.48 44.45,62.87 47.31,60.01 POTS.13
MUX1_SIG
  Top 0.152: TEENSY++.F1 57.15,55.88 57.15,64.14 54.29,66.99 POTS.1
MUX2_S0  (via drill 0.33)
  Top 0.152: v84.77,42.23 85.41,42.86 85.41,46.04 86.68,46.04 X.10
  Bottom 0.152: v84.77,42.23 82.55,40.01 61.59,40.01 TEENSY++.C1
MUX2_S1  (via drill 0.33)
  Top 0.152: v84.77,43.18 85.09,43.5 85.09,46.67 86.68,46.67 X.11 | v57.78,40.96 57.15,40.32 TEENSY++.C0
  Bottom 0.152: v84.77,43.18 84.45,42.86 80.33,42.86 78.42,40.96 v57.78,40.96
MUX2_S2  (via drill 0.33)
  Top 0.152: v78.11,49.85 78.11,46.67 79.38,46.67 X.14 | v55.24,50.16 54.61,49.53 TEENSY++.E1
  Bottom 0.152: v78.11,49.85 77.79,50.16 v55.24,50.16
MUX2_S3  (via drill 0.33)
  Top 0.152: v78.74,48.26 78.74,47.94 79.38,47.31 X.13 | v52.39,44.77 52.07,44.45 TEENSY++.E0
  Bottom 0.152: v78.74,48.26 77.15,49.85 57.47,49.85 v52.39,44.77
MUX2_SIG  (via drill 0.33)
  Top 0.152: v86.36,37.15 86.36,40.01 86.68,40.32 X.1 | v63.82,39.37 63.5,39.69 63.5,52.07 TEENSY++.F2
  Bottom 0.152: v86.36,37.15 84.77,38.73 76.2,38.73 75.56,39.37 v63.82,39.37
MUX3_S0  (via drill 0.33)
  Top 0.152: v76.2,37.15 76.2,35.24 77.47,33.97 77.47,2.54 60.33,2.54 54.93,7.94 54.93,11.43 Y.10
  Bottom 0.152: v76.2,37.15 75.88,36.83 71.12,36.83 TEENSY++.C5
MUX3_S1  (via drill 0.33)
  Top 0.152: v55.56,15.24 55.56,11.75 Y.11 | v66.99,16.19 67.31,16.51 TEENSY++.C4
  Bottom 0.152: v55.56,15.24 56.52,16.19 v66.99,16.19
MUX3_S2  (via drill 0.33)
  Top 0.152: v57.78,21.91 55.56,19.68 55.56,19.05 Y.14 | TEENSY++.C3 v64.77,21.91
  Bottom 0.152: v64.77,21.91 v57.78,21.91
MUX3_S3
  Top 0.152: TEENSY++.C2 62.23,13.34 61.28,13.34 60.96,13.65 60.96,13.97 56.2,18.73 Y.13
MUX3_SIG  (via drill 0.33)
  Top 0.152: v48.58,13.02 48.58,12.38 49.21,11.75 Y.1 | v45.09,16.51 44.45,17.14 44.45,36.2 45.72,37.47 v45.72,51.44
  Bottom 0.152: v45.09,16.51 v48.58,13.02 | v45.72,51.44 62.87,51.44 TEENSY++.F3
MUX4_S0  (via drill 0.33)
  Top 0.152: v14.92,39.37 14.92,38.42 13.65,38.42 BUTTONS.10 | v36.2,40.64 36.83,41.27 TEENSY++.B3
  Bottom 0.152: v14.92,39.37 16.19,40.64 v36.2,40.64
MUX4_S1  (via drill 0.33)
  Top 0.152: v15.56,38.73 15.56,37.78 13.65,37.78 BUTTONS.11 | TEENSY++.B2 v39.37,41.59
  Bottom 0.152: v15.56,38.73 16.83,40.01 37.78,40.01 v39.37,41.59
MUX4_S2  (via drill 0.33)
  Top 0.152: v24.45,54.93 23.81,54.29 23.81,50.8 23.18,50.16 23.18,38.73 22.86,38.42 22.86,37.78 20.95,37.78 BUTTONS.14
  Bottom 0.152: v24.45,54.93 40.32,54.93 TEENSY++.B1
MUX4_S3  (via drill 0.33)
  Top 0.152: v23.81,49.85 23.81,38.73 23.18,38.1 23.18,37.15 20.95,37.15 BUTTONS.13
  Bottom 0.152: v23.81,49.85 30.16,49.85 31.43,51.12 43.81,51.12 44.45,51.75 TEENSY++.B0
MUX4_SIG  (via drill 0.33)
  Top 0.152: v14.29,46.99 14.29,44.77 13.65,44.13 BUTTONS.1 | TEENSY++.F4 v64.77,50.8
  Bottom 0.152: v14.29,46.99 16.51,49.21 30.16,49.21 31.75,50.8 v64.77,50.8
POT_C0  (via drill 0.33)
  Top 0.152: v54.93,72.39 54.93,71.75 52.07,71.75 49.21,68.9 49.21,67.31 POTS.9
  Bottom 0.152: v54.93,72.39 72.39,72.39 POT_1.1
POT_C1  (via drill 0.33)
  Top 0.152: v49.85,65.72 49.85,66.99 POTS.8 | POT_1.2 v70.8,68.26
  Bottom 0.152: v49.85,65.72 52.39,68.26 v70.8,68.26
POT_C2  (via drill 0.33)
  Top 0.152: v50.48,69.22 50.48,67.31 POTS.7
  Bottom 0.152: v50.48,69.22 53.02,71.75 76.83,71.75 POT_1.3
POT_C3  (via drill 0.33)
  Top 0.152: v51.12,68.58 51.12,67.31 POTS.6
  Bottom 0.152: v51.12,68.58 53.98,71.44 79.06,71.44 POT_1.4
POT_C4  (via drill 0.33)
  Top 0.152: v51.75,65.72 51.75,66.99 POTS.5 | v91.12,60.33 94.3,57.15 94.3,46.99 94.93,46.35 94.93,38.73 93.98,37.78 POT_2.1
  Bottom 0.152: v51.75,65.72 57.15,60.33 v91.12,60.33
POT_C5  (via drill 0.33)
  Top 0.152: v52.39,64.14 52.39,66.99 POTS.4 | v93.03,47.62 94.61,46.04 94.61,39.05 92.71,37.15 92.71,20.32 POT_2.2
  Bottom 0.152: v52.39,64.14 60.96,55.56 80.64,55.56 88.58,47.62 v93.03,47.62
POT_C6  (via drill 0.33)
  Top 0.152: v53.02,65.72 53.02,66.99 POTS.3 | v96.84,41.59 97.16,41.27 97.16,35.88 97.47,35.56 97.47,20 POT_2.3
  Bottom 0.152: v53.02,65.72 55.88,62.87 92.71,62.87 95.25,60.33 96.52,60.33 97.16,59.69 97.16,41.59 v96.84,41.59
POT_C7  (via drill 0.33)
  Top 0.152: v61.59,13.97 59.69,15.88 59.69,31.75 60.96,33.02 60.96,53.98 59.69,55.24 59.69,73.66 57.47,73.66 53.66,69.85 53.66,67.31 POTS.2
  Bottom 0.152: POT_2.4 v61.59,13.97
POT_C8  (via drill 0.33)
  Top 0.152: v53.34,50.16 53.34,53.98 53.66,54.29 53.66,59.69 POTS.23 | v30.8,48.9 30.48,48.58 30.48,27.94 26.67,24.13 26.67,6.35 27.3,5.71 30.48,5.71 POT_3.1
  Bottom 0.152: v53.34,50.16 52.07,48.9 v30.8,48.9
POT_C9  (via drill 0.33)
  Top 0.152: v53.02,58.42 53.02,59.69 POTS.22 | v55.56,56.83 58.42,53.98 v58.42,34.29 | v31.11,33.66 30.8,33.34 30.8,26.04 29.21,24.45 29.21,8.26 POT_3.2
  Bottom 0.152: v53.02,58.42 54.61,56.83 v55.56,56.83 | v58.42,34.29 57.78,33.66 v31.11,33.66
POT_C10  (via drill 0.33)
  Top 0.152: v52.39,55.24 52.39,59.69 POTS.21 | v54.93,54.93 55.88,53.98 v55.88,37.15 | v20.95,32.38 21.27,32.07 21.27,11.75 25.4,7.62 POT_3.3
  Bottom 0.152: v52.39,55.24 52.7,54.93 v54.93,54.93 | v55.88,37.15 54.29,35.56 24.13,35.56 v20.95,32.38
POT_C11  (via drill 0.33)
  Top 0.152: v51.44,57.78 51.75,58.1 51.75,59.69 POTS.20 | v9.21,58.74 7.62,57.15 v7.62,13.34
  Bottom 0.152: v51.44,57.78 50.48,57.78 50.16,58.1 50.16,58.74 v9.21,58.74 | v7.62,13.34 13.02,7.94 21.91,7.94 POT_3.4
POT_C12  (via drill 0.33)
  Top 0.152: v51.12,61.28 51.12,60.01 POTS.19
  Bottom 0.152: v51.12,61.28 48.26,64.14 POT_4.1
POT_C13  (via drill 0.33)
  Top 0.152: v50.48,64.14 50.48,60.01 POTS.18
  Bottom 0.152: v50.48,64.14 49.53,65.09 8.57,65.09 POT_4.2
POT_C14  (via drill 0.33)
  Top 0.152: v49.85,63.5 49.85,60.01 POTS.17
  Bottom 0.152: v49.85,63.5 48.58,64.77 8.26,64.77 7.62,65.41 6.35,65.41 5.71,66.04 5.71,69.22 POT_4.3
POT_C15  (via drill 0.33)
  Top 0.152: v48.58,61.59 49.21,60.96 49.21,60.01 POTS.16 | v9.84,63.5 8.26,65.09 8.26,70.48 POT_4.4
  Bottom 0.152: v48.58,61.59 46.67,63.5 v9.84,63.5
SCL
  Top 0.152: I2C.2 15.88,5.4 15.88,9.84 R1.P$1 16.19,10.16 16.19,11.43 19.05,11.43 20,10.48 20,5.4 30.8,5.4 31.75,6.35 TEENSY++.D0
SDA
  Top 0.152: R2.P$2 18.73,9.84 18.73,5.4 I2C.1 18.73,5.08 18.73,2.54 36.2,2.54 36.83,3.17 36.83,4.45 34.29,6.99 TEENSY++.D1
X_C0  (via drill 0.33)
  Top 0.152: v83.19,73.66 83.19,53.02 87.95,48.26 87.95,45.4 87,45.4 X.9
  Bottom 0.152: v83.19,73.66 82.23,74.61 69.53,74.61 69.22,74.3 62.23,74.3 X_1.1
X_C1  (via drill 0.33)
  Top 0.152: v88.27,48.9 88.27,44.77 87,44.77 X.8 | v70.48,57.15 67.31,60.33 67.31,70.48 63.5,74.3 X_1.2
  Bottom 0.152: v88.27,48.9 80.01,57.15 v70.48,57.15
X_C2  (via drill 0.33)
  Top 0.152: v84.14,73.66 84.14,54.93 88.9,50.16 88.9,44.13 87,44.13 X.7
  Bottom 0.152: v84.14,73.66 80.96,76.83 67.31,76.83 X_1.3
X_C3
  Top 0.152: X_1.4 93.98,75.56 95.25,74.3 95.25,69.85 93.34,69.85 88.58,65.09 88.58,51.12 89.22,50.48 89.22,43.5 87,43.5 X.6
X_C4  (via drill 0.33)
  Top 0.152: v88.58,41.91 88.58,42.86 87,42.86 X.5
  Bottom 0.152: v88.58,41.91 89.53,40.96 99.06,40.96 99.38,40.64 99.38,34.29 X_2.1
X_C5  (via drill 0.33)
  Top 0.152: v85.41,33.02 85.41,42.23 86.68,42.23 X.4
  Bottom 0.152: v85.41,33.02 94.61,33.02 X_2.2
X_C6  (via drill 0.33)
  Top 0.152: v86.68,31.11 86.68,32.7 85.72,33.66 85.72,41.59 86.68,41.59 X.3
  Bottom 0.152: v86.68,31.11 87.31,30.48 94.61,30.48 X_2.3
X_C7
  Top 0.152: X_2.4 95.57,26.35 95.57,18.73 94.61,17.78 93.34,17.78 92.39,18.73 92.39,21.59 87.95,26.04 87.95,40.96 87,40.96 X.2
X_C8  (via drill 0.33)
  Top 0.152: v55.88,4.13 55.88,2.22 77.79,2.22 80.01,4.45 80.01,6.99 81.28,8.26 81.28,31.75 78.42,34.61 78.42,40.96 79.38,40.96 X.23
  Bottom 0.152: v55.88,4.13 55.56,3.81 48.26,3.81 46.67,5.4 44.77,5.4 X_3.1
X_C9  (via drill 0.33)
  Top 0.152: v53.66,1.91 81.28,1.91 85.09,5.71 85.09,26.99 82.23,29.84 82.23,37.47 83.82,37.47 84.14,37.78 84.14,39.05 83.82,39.37 83.82,41.59 79.69,41.59 X.22
  Bottom 0.152: v53.66,1.91 53.34,2.22 42.23,2.22 X_3.2
X_C10  (via drill 0.33)
  Top 0.152: v79.69,32.38 78.11,33.97 78.11,42.23 79.38,42.23 X.21 | v32.38,30.48 32.7,30.16 v32.7,5.08
  Bottom 0.152: v79.69,32.38 79.38,32.7 36.51,32.7 34.29,30.48 v32.38,30.48 | v32.7,5.08 36.83,5.08 X_3.3
X_C11  (via drill 0.33)
  Top 0.152: v77.15,35.24 77.15,42.86 79.38,42.86 X.20 | v33.66,34.29 33.97,33.97 33.97,5.4 X_3.4
  Bottom 0.152: v77.15,35.24 76.83,34.92 39.69,34.92 39.05,34.29 v33.66,34.29
X_C12  (via drill 0.33)
  Top 0.152: v80.96,42.23 80.96,43.5 79.69,43.5 X.19
  Bottom 0.152: v80.96,42.23 79.06,40.32 54.93,40.32 53.34,38.73 53.34,36.83 6.03,36.83 3.81,39.05 X_4.1
X_C13  (via drill 0.33)
  Top 0.152: v80.64,70.48 80.64,44.13 79.69,44.13 X.18
  Bottom 0.152: v80.64,70.48 81.92,71.75 81.92,74.3 69.85,74.3 69.53,73.98 53.98,73.98 53.66,74.3 32.38,74.3 31.75,74.93 12.06,74.93 7.62,70.48 6.35,70.48 5.08,69.22 5.08,55.56 4.76,55.56 4.45,55.24 3.17,55.24 2.54,54.61 2.54,51.44 X_4.2
X_C14  (via drill 0.33)
  Top 0.152: v76.83,53.34 76.83,44.77 79.38,44.77 X.17
  Bottom 0.152: v76.83,53.34 74.93,55.24 55.88,55.24 54.61,56.52 21.27,56.52 20,55.24 5.08,55.24 X_4.3
X_C15  (via drill 0.33)
  Top 0.152: v77.47,47.94 77.47,45.4 79.38,45.4 X.16
  Bottom 0.152: v77.47,47.94 75.88,49.53 58.1,49.53 52.7,44.13 28.26,44.13 26.04,46.35 8.26,46.35 4.45,50.16 3.17,50.16 2.22,51.12 2.22,56.52 X_4.4
Y_C0  (via drill 0.33)
  Top 0.152: v2.54,69.22 2.54,13.97 6.03,10.48 6.03,1.59 52.39,1.59 55.24,4.45 55.24,5.71 54.29,6.67 54.29,11.43 Y.9
  Bottom 0.152: v2.54,69.22 8.89,75.56 Y_1.1
Y_C1  (via drill 0.33)
  Top 0.152: v23.18,76.83 10.48,64.14 10.48,48.58 7.94,46.04 7.94,17.14 10.16,14.92 10.16,1.91 51.12,1.91 52.7,3.49 52.7,7.62 53.66,8.57 53.66,11.43 Y.8
  Bottom 0.152: v23.18,76.83 36.83,76.83 Y_1.2
Y_C2  (via drill 0.33)
  Top 0.152: v53.02,10.16 53.02,11.43 Y.7 | v13.02,11.75 11.11,13.65 11.11,38.42 10.79,38.73 10.79,63.5 v24.77,77.47
  Bottom 0.152: v53.02,10.16 51.75,11.43 26.67,11.43 26.35,11.75 v13.02,11.75 | v24.77,77.47 25.08,77.15 39.05,77.15 Y_1.3
Y_C3  (via drill 0.33)
  Top 0.152: v48.26,6.67 52.39,10.79 52.39,11.43 Y.6
  Bottom 0.152: v48.26,6.67 47.31,5.71 20,5.71 18.1,7.62 8.89,7.62 1.59,14.92 1.59,75.88 arc-90 4.13,78.42 40.32,78.42 Y_1.4
Y_C4  (via drill 0.33)
  Top 0.152: v51.75,13.65 51.75,11.75 Y.5 | v97.79,15.88 97.79,39.69 97.47,40.01 97.47,54.29 96.52,55.24 94.61,55.24 94.61,57.78 Y_2.1
  Bottom 0.152: v51.75,13.65 52.7,12.7 94.61,12.7 v97.79,15.88
Y_C5  (via drill 0.33)
  Top 0.152: v51.12,13.02 51.12,11.75 Y.4 | v95.25,12.38 98.42,15.56 98.42,39.69 97.79,40.32 97.79,54.61 Y_2.2
  Bottom 0.152: v51.12,13.02 51.75,12.38 v95.25,12.38
Y_C6  (via drill 0.33)
  Top 0.152: v50.48,13.97 50.48,11.75 Y.3 | v96.2,25.08 97.16,26.04 97.16,35.24 96.2,36.2 96.2,49.85 97.16,50.8 97.16,52.7 Y_2.3
  Bottom 0.152: v50.48,13.97 51.12,14.61 85.09,14.61 95.57,25.08 v96.2,25.08
Y_C7  (via drill 0.33)
  Top 0.152: v49.85,13.34 49.85,11.75 Y.2 | v94.61,25.72 94.61,37.78 95.89,39.05 Y_2.4
  Bottom 0.152: v49.85,13.34 49.85,16.51 66.36,16.51 66.67,16.83 85.72,16.83 v94.61,25.72
Y_C8  (via drill 0.33)
  Top 0.152: v46.67,3.49 47.62,4.45 47.62,13.02 49.85,15.24 49.85,18.73 Y.23
  Bottom 0.152: v46.67,3.49 47.62,2.54 67.31,2.54 Y_3.1
Y_C9  (via drill 0.33)
  Top 0.152: v50.48,17.46 50.48,18.73 Y.22 | v69.22,17.78 69.85,17.14 69.85,7.62 Y_3.2
  Bottom 0.152: v50.48,17.46 50.8,17.78 v69.22,17.78
Y_C10  (via drill 0.33)
  Top 0.152: v54.93,13.97 51.12,17.78 51.12,18.73 Y.21 | v56.83,13.34 59.69,10.48 59.69,7.62 Y_3.3
  Bottom 0.152: v54.93,13.97 55.56,13.34 v56.83,13.34
Y_C11  (via drill 0.33)
  Top 0.152: v46.35,4.76 46.35,20 51.44,20 51.75,19.68 51.75,19.05 Y.20
  Bottom 0.152: v46.35,4.76 47.62,3.49 60.64,3.49 Y_3.4
Y_C12  (via drill 0.33)
  Top 0.152: v52.39,20.32 52.39,19.05 Y.19
  Bottom 0.152: v52.39,20.32 9.53,20.32 Y_4.1
Y_C13  (via drill 0.33)
  Top 0.152: v53.02,20.95 53.02,19.05 Y.18
  Bottom 0.152: v53.02,20.95 39.37,20.95 39.05,20.64 11.11,20.64 3.81,27.94 Y_4.2
Y_C14  (via drill 0.33)
  Top 0.152: v53.66,21.59 53.66,19.05 Y.17
  Bottom 0.152: v53.66,21.59 39.37,21.59 38.73,20.95 11.43,20.95 5.08,27.3 5.08,31.11 Y_4.3
Y_C15  (via drill 0.33)
  Top 0.152: v54.61,26.67 54.61,22.86 54.29,22.54 54.29,19.05 Y.16
  Bottom 0.152: v54.61,26.67 54.29,26.99 15.56,26.99 10.16,32.38 5.08,32.38 Y_4.4

## Text on the board
tValues: (0) (1) (2) (3) | (0) (1) (2) (3) | (15) | (0) (1) (2) (3) | (+) | (-) | (0) (1) (2) (3) | (4) | (14) | (5) | (0) (1) (2) (3) | (0) (1) (2) (3) | (13) | (6) | (12) | (7) | (4) | (4) | (15) | (15) | (5) | (5) | 5V | R | G | Pots Sig | X Sig | Y Sig | Button Sig | (14) | (14) | (6) | (6) | (13) | (13) | (7) | (7) | (12) | (12) | (-) | (+) | (+) | (-) | SCL | SDA | (15) | (15) | (4) | (4) | (5) | (5) | (14) | (14) | (13) | (13) | B | C | A | 0 | 1 | 2 | 3 | 4 | 5 | 6 | 7 | 8 | 9 | 10 | 11 | 12 | 13 | 14 | 15 | (6) | (6) | (7) | (7) | (12) | (12) | R | G | BU | (-) | 0 | 1 | 2 | 3 | 4 | 5 | 6 | 7 | 8 | 9 | 10 | 11 | 12 | 13 | 14 | 15 | (4) | (15) | (5) | (14) | (6) | (13) | (7) | (12) | (-) | (+) | SCL | SDA | (-) | (+) | (11) (10) (9) (8) | (-) | (+) | (11) (10) (9) (8) | (11) (10) (9) (8) | (11) (10) (9) (8) | 5V IN | (11) (10) (9) (8) | (11) (10) (9) (8) | 5V OUT